# Altium PCB Copy of PCB.PcbDoc
Units mm, origin at the board's own origin, x right, y up, seen from the top; angles counter-clockwise.
Board outline 34.04 x 18.67 mm, 2 copper layers (Top Layer, Bottom Layer); 31 components, 23 nets, 127 pads, 31 vias.
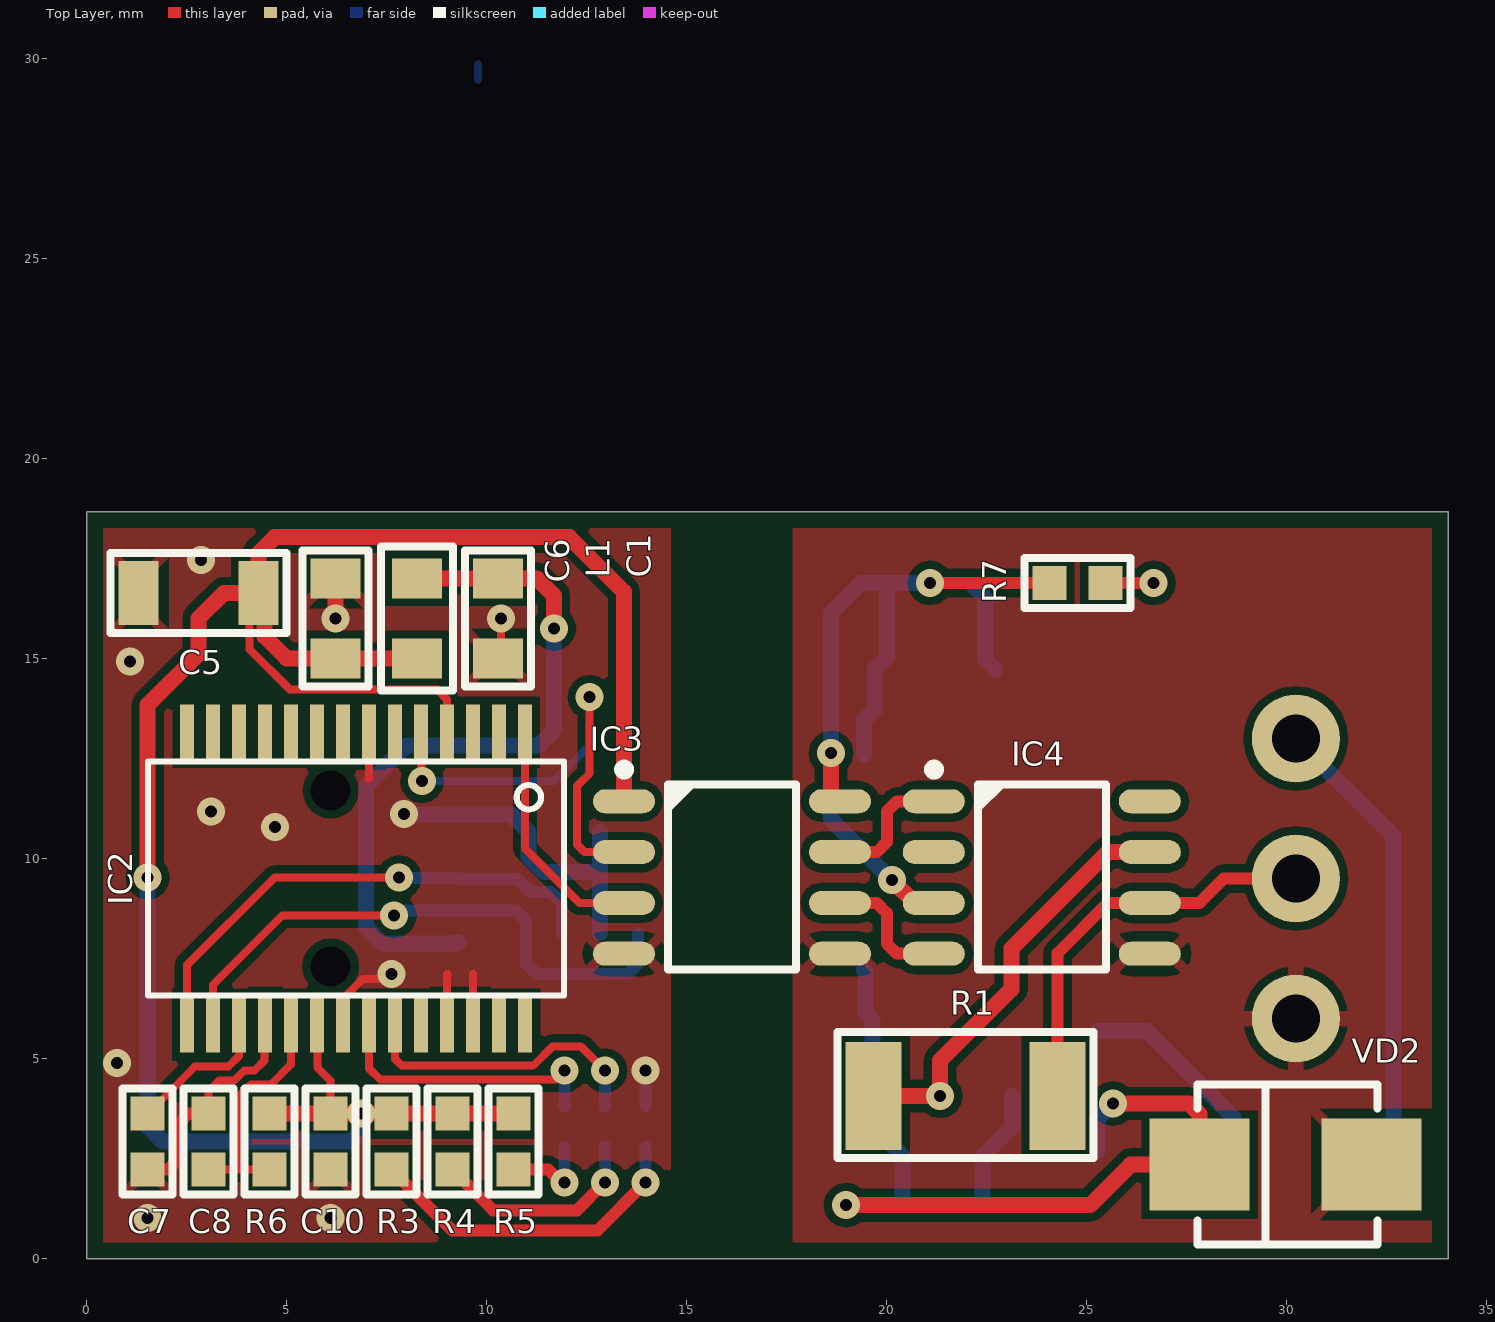
[diagram p0: Top Layer view]
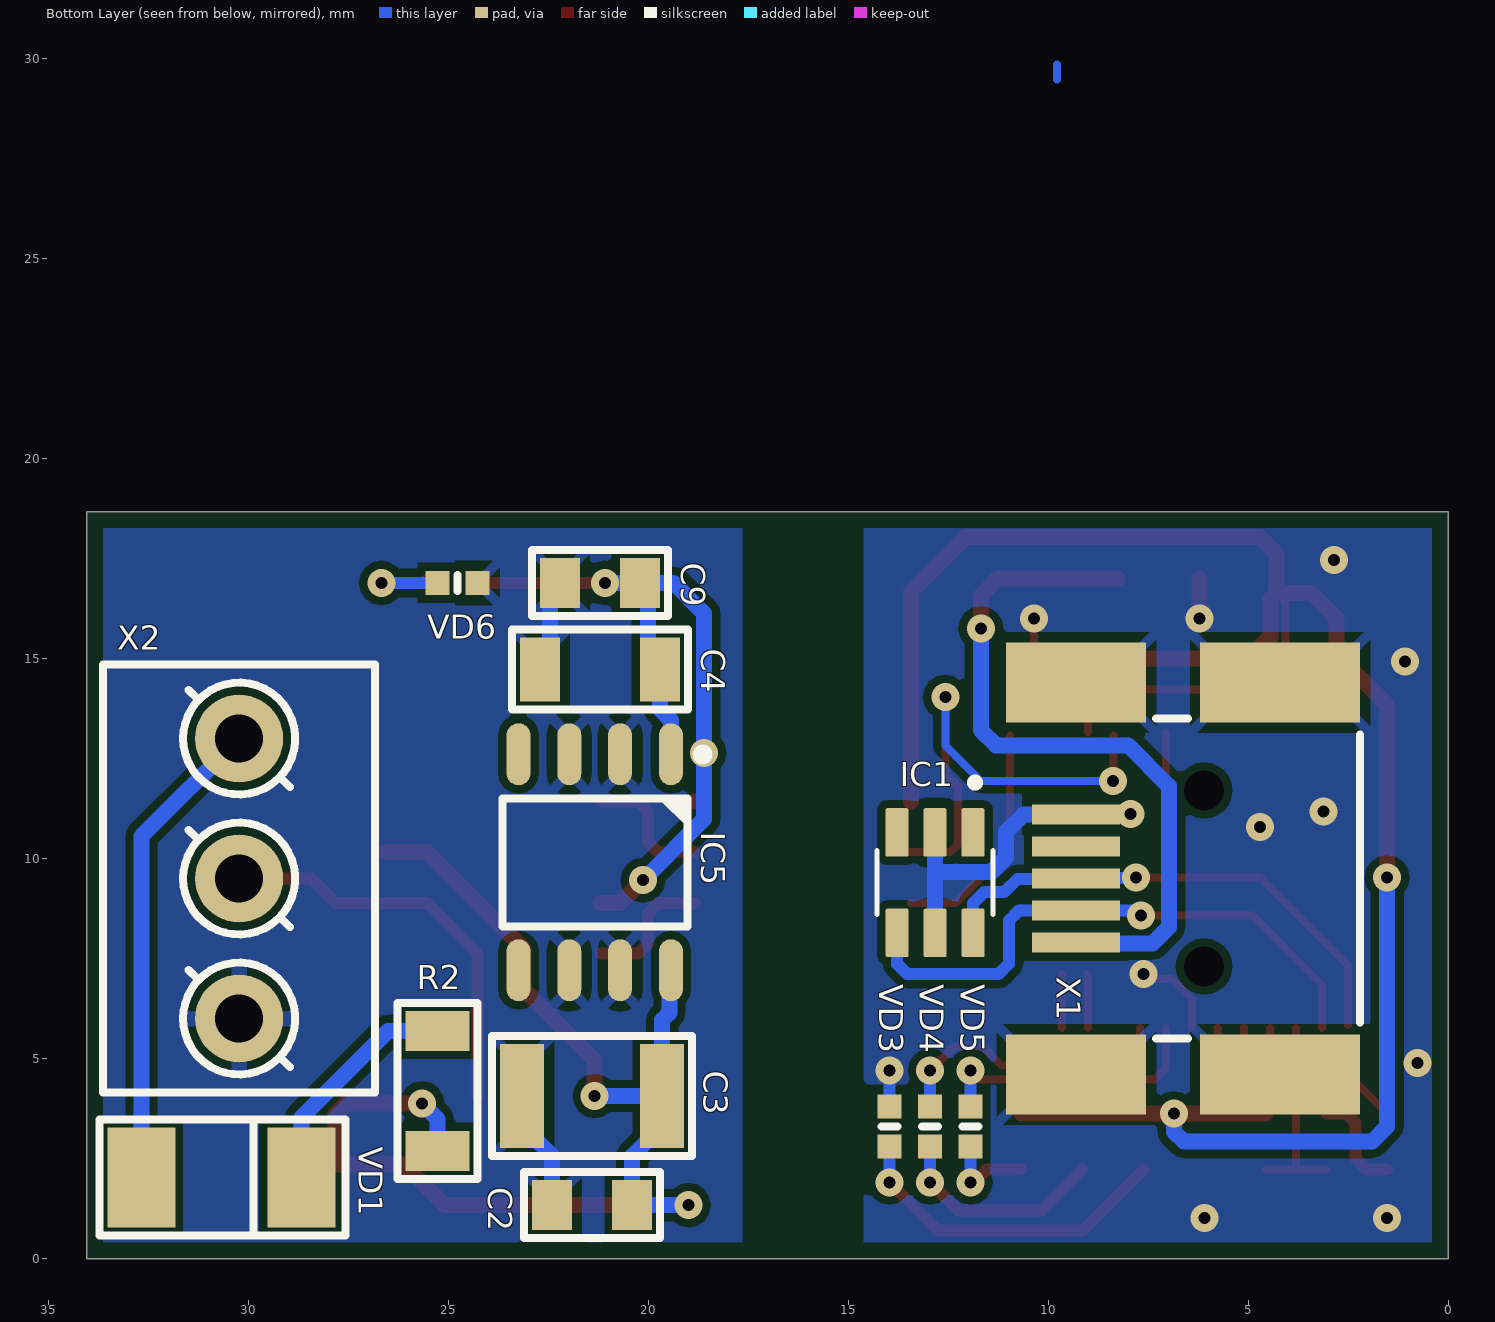
[diagram p1: Bottom Layer view, seen from below]

## Layer stack, top to bottom
Top Solder: solder mask 0.0102, Solder Resist, Dk 3.5
Top Layer: signal copper 0.0356
Dielectric 1: dielectric 0.32, FR-4, Dk 4.8
Bottom Layer: signal copper 0.0356
Bottom Solder: solder mask 0.0102, Solder Resist, Dk 3.5

## Board outline
0,0 34.036,0 34.036,18.669 0,18.669

## Design rules (kind name [scope] priority, off if disabled: settings)
BoardOutlineClearance [All] p1: gap=0.4 ignorepadtopadclearanceinfootprint=FALSE
Clearance Clearance_1 [InPolygon] p1: gap=0.2 ignorepadtopadclearanceinfootprint=FALSE
Clearance [All] p2: gap=0.15 ignorepadtopadclearanceinfootprint=FALSE
HoleSize [All] p1: absolutevalues=TRUE maxlimit=2.54 minlimit=0.3 maxpercent=80.000 minpercent=20.000
HoleToHoleClearance [All] p1: gap=0.2 allowstackedmicrovias=TRUE
MinimumAnnularRing [All] p1: minimumring=0.2
MinimumSolderMaskSliver [All] p1: minsoldermaskwidth=0.15
PolygonConnect PolygonConnect_1 [IsVia] p1: connectstyle=Direct reliefconductorwidth=0.254 reliefentries=4 polygonreliefangle="90 Angle" airgapwidth=0.254
PolygonConnect [All] p2: thpad.connectstyle=Relief thpad.reliefconductorwidth=0.4 thpad.reliefentries=4 thpad.polygonreliefangle="90 Angle" thpad.airgapwidth=0.2 smdpad.connectstyle=Relief smdpad.reliefconductorwidth=0.254 smdpad.reliefentries=4 smdpad.polygonreliefangle="45 Angle" smdpad.airgapwidth=0.254 via.connectstyle=Relief via.reliefconductorwidth=0.254 via.reliefentries=4 via.polygonreliefangle="45 Angle" via.airgapwidth=0.254
RoutingVias [All] p1: holewidth=0.3 width=0.6 viastyle="Through Hole" minholewidth=0.3 minwidth=0.6 maxholewidth=0.3 maxwidth=0.6
SilkToSilkClearance [All] p1: silktosilkclearance=0.1
SilkToSolderMaskClearance [IsPad] p1: minsilkscreentomaskgap=0.15 clearancetoexposedcopper=TRUE
SolderMaskExpansion [All] p1: expansion=0.102
UnRoutedNet [All] p1: checkbadconnections=TRUE
UnpouredPolygon [All] p1: allowunpoured=TRUE
Width [All] p1: maxlimit=2 minlimit=0.125 preferedwidth=0.15 minimp=50.000000 maximp=50.000000 favimp=50.000000
23 further rules are at their usual default settings.

## Components (designator, comment, footprint, x,y, rotation, side; value= is the part's Value field where it differs from the comment)
C1 "Ceramic capacitor, 0.1μF, X7R, ±10%, 16V, 0805, -55...+125°C" "CAP: 0805" 10.287,16.002 r90 top value=0.1?F
C2 "Ceramic capacitor, 0.1μF, X7R, ±10%, 16V, 0805, -55...+125°C" "CAP: 0805" 21.399,1.333 r180 bottom value=0.1?F
C3 "Ceramic capacitor, 10μF, X7R, ±10%, 50V, 1210, -55...+125°C" "CAP: 1210" 21.399,4.064 r180 bottom value=10?F
C4 "Ceramic capacitor, 4.7μF, X7R, ±10%, 50V, 1206, -55...+125°C" "CAP: 1206" 21.209,14.732 r180 bottom value=4.7?F
C5 "Ceramic capacitor, 4.7μF, X7R, ±10%, 50V, 1206, -55...+125°C" "CAP: 1206" 2.794,16.637 r0 top value=4.7?F
C6 "Ceramic capacitor, 0.1μF, X7R, ±10%, 16V, 0805, -55...+125°C" "CAP: 0805" 6.223,16.002 r270 top value=0.1?F
C7 "Ceramic capacitor, 0.1μF, X7R, ±10%, 16V, 0603, -55...+125°C" "CAP: 0603" 1.524,2.921 r90 top value=0.1?F
C8 "Ceramic capacitor, 0.1μF, X7R, ±10%, 16V, 0603, -55...+125°C" "CAP: 0603" 3.048,2.921 r270 top value=0.1?F
C9 "Ceramic capacitor, 0.1μF, X7R, ±10%, 16V, 0805, -55...+125°C" "CAP: 0805" 21.209,16.891 r180 bottom value=0.1?F
C10 "Ceramic capacitor, 0.1μF, X7R, ±10%, 16V, 0805, -55...+125°C" "CAP: 0603" 6.096,2.921 r90 top value=0.1?F
IC1 "SN65220DBVR" SOT95P280X145-6N 12.827,9.398 r270 bottom
IC2 "FT232RL" SSOP28-LD 6.735,9.5 r180 top
IC3 "IC digital isolator, 100Mbps, 3000Vrms, 2.25...5.5V, -55...+125°C, 8-SOIC" 8-SOIC 16.129,9.525 r0 top
IC4 "Si9243" 8-SOIC 23.876,9.525 r0 top
IC5 "LM2936-5.0" 8-SOIC 21.336,9.906 r270 bottom
L1 "Fixed inductor, 47μH, ±20%, 0805, 100mA, -55...+125°C" "IND: 0805" 8.255,16.002 r90 top value=47?H
R1 "Resistor film, 510R, ±5%, 2010, 0.75W, -55...+125°C" "RES: 2010" 21.971,4.064 r180 top value=510R
R2 "Resistor film, 10R, ±5%, 1206, 0.25W, -55...+125°C" "RES: 1206" 25.273,4.191 r90 bottom value=10R
R3 "Resistor film, 270R, ±5%, 0603, 0.1W, -55...+125°C" "RES: 0603" 7.62,2.921 r90 top value=270R
R4 "Resistor film, 270R, ±5%, 0603, 0.1W, -55...+125°C" "RES: 0603" 9.144,2.921 r90 top value=270R
R5 "Resistor film, 270R, ±5%, 0603, 0.1W, -55...+125°C" "RES: 0603" 10.668,2.921 r90 top value=270R
R6 "Resistor film, 10K, ±5%, 0603, 0.1W, -55...+125°C" "RES: 0603" 4.572,2.921 r90 top value=10K
R7 "Resistor film, 270R, ±5%, 0603, 0.1W, -55...+125°C" "RES: 0603" 24.765,16.891 r180 top value=270R
VD1 "Single diode, 75V, 150mA, 1V, 4ns, SOD-323, -55...+150°C" "DIODE: SMA" 30.67,2.032 r180 bottom
VD2 "Zener diode, 18V, 500mW, 0.9V, 17Ohm, SOD-123, -55...+150°C" "DIODE: SMB" 29.972,2.349 r180 top locked
VD3 "LED, *, *, *, -55...+150°C" "LED: 0402B" 13.97,3.302 r90 bottom
VD4 "LED, *, *, *, -55...+150°C" "LED: 0402B" 12.954,3.302 r90 bottom
VD5 "LED, *, *, *, -55...+150°C" "LED: 0402B" 11.938,3.302 r90 bottom
VD6 "LED, *, *, *, -55...+150°C" "LED: 0402B" 24.765,16.891 r180 bottom
X1 "USB mini B" "CON: 0675031020" 9.3,9.5 r0 bottom locked
X2 "Terminal connector, 3pin, 3.5mm, 300VAC, 10A" "CON: DG350-3.5-03P" 30.226,9.5 r270 bottom

## Footprints (in the part's own frame and the unit in brackets; to place one, negate y for a bottom-side part, rotate by r counter-clockwise, add the part's x,y. Pads: shape width x height; smd on the part's side, far side on the other; paste and mask are expansions set on the pad)
8-SOIC [mm] "pitch 1.27 mm"
  rrect100% 1.55x0.6 smd: 1(-2.7,1.905) 2(-2.7,0.635) 3(-2.7,-0.635) 4(-2.7,-1.905) 5(2.7,-1.905) 6(2.7,-0.635) 7(2.7,0.635) 8(2.7,1.905)
  round 0.7 on Mech1: 28(-2.395,1.8)
  silkscreen extent -2.82,-2.3 1.61,2.82, body extent -3,-2.45 3,2.45, height 1.75
"CAP: 0603" [mm]
  rect 0.85x0.85 smd: 1(-0.7,0) 2(0.7,0)
  silkscreen extent -1.33,-0.62 1.33,0.62, body extent -0.8,-0.4 0.8,0.4, height 0.3
"CAP: 0805" [mm]
  rect 1x1.25 smd: 1(-1,0) 2(1,0)
  silkscreen extent -1.7,-0.82 1.7,0.82, body extent -1,-0.62 1,0.63, height 0.78
"CAP: 1206" [mm]
  rect 1x1.6 smd: 1(-1.5,0) 2(1.5,0)
  silkscreen extent -2.2,-1 2.2,1, body extent -1.6,-0.8 1.6,0.8, height 1
"CAP: 1210" [mm]
  rect 1.1x2.6 smd: 1(-1.75,0) 2(1.75,0)
  silkscreen extent -2.5,-1.5 2.5,1.5, body extent -2,-1.24 2,1.24, height 1.7
"CON: 0675031020" [mm]
  rect 4x2 smd: 0(-5.1,-4.9) 0(-5.1,4.9)
  rect 3.5x2 smd: 0(0,-4.9) 0(0,4.9)
  rect 2.2x0.5 smd: 1(0,1.6) 2(0,0.8) 3(0,0) 4(0,-0.8) 5(0,-1.6)
  round 0 hole 1: ""(-3.2,-2.2) ""(-3.2,2.2)
  round 0.5 on Mech1: ""(-0.6,4.5)
  round 0.5 on Bottom Overlay: ""(1,2.5)
  silkscreen extent -7.1,-4 -2,4, body extent -9.1,-4.95 -0.1,4.95, height 3.95
"CON: DG350-3.5-03P" [mm]
  round 2.2 hole 1.2: 1(-3.5,0) 2(0,0) 3(3.5,0)
  round 0.5 on Bottom Overlay: ""(-4.85,-2.9)
  silkscreen extent -5.35,-3.4 5.35,3.4, body extent -5.75,-3.4 5.75,3.4, height 8.4
"DIODE: SMA" [mm]
  rect 1.7x2.5 smd: 1(-2,0) 2(2,0)
  round 0.5 on Mech1: ""(2,0.9)
  silkscreen extent -3.05,-1.45 3.1,1.45, body extent -2.5,-1.35 2.5,1.35, height 2.28
"DIODE: SMB" [mm]
  rect 2.5x2.3 smd: 1(-2.15,0) 2(2.15,0)
  silkscreen extent -2.3,-2 2.2,2, body extent -2.75,-1.95 2.75,1.95, height 2.45
"IND: 0805" [mm]
  rect 1x1.25 smd: 1(-1,0) 2(1,0)
  silkscreen extent -1.8,-0.9 1.8,0.9, body extent -1,-0.62 1,0.63, height 0.85
"LED: 0402B" [mm]
  rect 0.6x0.6 smd: 1(-0.5,0) 2(0.5,0)
  silkscreen extent 0,-0.2 0,0.2, body extent -0.5,-0.25 0.51,0.25, height 0.45
"RES: 0603" [mm]
  rect 0.85x0.85 smd: 1(-0.7,0) 2(0.7,0)
  silkscreen extent -1.33,-0.62 1.33,0.62, body extent -0.8,-0.4 0.8,0.4, height 0.44
"RES: 1206" [mm]
  rect 1x1.6 smd: 1(-1.5,0) 2(1.5,0)
  silkscreen extent -2.2,-1 2.2,1, body extent -1.65,-0.8 1.55,0.8, height 0.47
"RES: 2010" [mm]
  rect 1.4x2.7 smd: 1(-2.3,0) 2(2.3,0)
  silkscreen extent -3.2,-1.6 3.2,1.55, body extent -2.5,-1.25 2.5,1.25, height 0.6
SOT95P280X145-6N [mm]
  rrect15% 1.21x0.58 smd: 1(-1.255,0.95) 2(-1.255,0) 3(-1.255,-0.95) 4(1.255,-0.95) 5(1.255,0) 6(1.255,0.95)
  silkscreen extent -2.6,-1.45 0.8,1.45
SSOP28-LD [mil]
  rect 13.7x55 smd: 1(-166.34,-143.94) 2(-140.75,-143.94) 3(-115.16,-143.94) 4(-89.57,-143.94) 5(-63.98,-143.94) 6(-38.39,-143.94) 7(-12.8,-143.94) 8(12.8,-143.94) 9(38.39,-143.94) 10(63.98,-143.94) 11(89.57,-143.94) 12(115.16,-143.94) 13(140.75,-143.94) 14(166.34,-143.94) 15(166.34,143.94) 16(140.75,143.94) 17(115.16,143.94) 18(89.57,143.94) 19(63.98,143.94) 20(38.39,143.94) 21(12.8,143.94) 22(-12.8,143.94) 23(-38.39,143.94) 24(-63.98,143.94) 25(-89.57,143.94) 26(-115.16,143.94) 27(-140.75,143.94) 28(-166.34,143.94)
  silkscreen extent -205,-115 205,115

## Part data
C1 C2 C6 C9 C10: library part Ceramic_0805, Manufacturer=Yageo, Package=0805, PartNumber=CC0805KRX7R7BB104, Temperature=-55...+125°C, Tolerance=±10%, TypeCapacitor="Ceramic capacitor", TypeDielectric=X7R, ValueManufacturerPartNumber="Ceramic capacitor, 0.1?F, X7R, ±10%, 16V, 0805, -55...+125°C", Voltage=16V, HelpURL=https://www.digikey.com/product-detail/en/yageo/CC0805KRX7R7BB104/311-1142-1-ND/303052
C3: library part Ceramic_1210, Manufacturer=Yageo, Package=1210, PartNumber=CC1210KKX7R9BB104, Temperature=-55...+125°C, Tolerance=±10%, TypeCapacitor="Ceramic capacitor", TypeDielectric=X7R, ValueManufacturerPartNumber="Ceramic capacitor, 10?F, X7R, ±10%, 50V, 1210, -55...+125°C", Voltage=50V, HelpURL=https://www.digikey.com/product-detail/en/yageo/CC1210KKX7R9BB104/311-4522-1-ND/8025611
C4 C5: library part Ceramic_1206, Manufacturer=Yageo, Package=1206, PartNumber=CC1206KRX7R9BB104, Temperature=-55...+125°C, Tolerance=±10%, TypeCapacitor="Ceramic capacitor", TypeDielectric=X7R, ValueManufacturerPartNumber="Ceramic capacitor, 4.7?F, X7R, ±10%, 50V, 1206, -55...+125°C", Voltage=50V, HelpURL=https://www.digikey.com/product-detail/en/yageo/CC1206KRX7R9BB104/311-1179-1-ND/303089
C7 C8: library part Ceramic_0603, Manufacturer=Yageo, Package=0603, PartNumber=CC0603KRX7R7BB104, Temperature=-55...+125°C, Tolerance=±10%, TypeCapacitor="Ceramic capacitor", TypeDielectric=X7R, ValueManufacturerPartNumber="Ceramic capacitor, 0.1?F, X7R, ±10%, 16V, 0603, -55...+125°C", Voltage=16V, HelpURL=https://www.digikey.com/product-detail/en/yageo/CC0603KRX7R7BB104/311-1088-1-ND/302998
IC1: "IC SINGLE USB PORT TVS SOT-23-6", Package="SOT-23-6 Texas Instruments", Availability=Unavailable, MF="Texas Instruments", MP=SN65220DBVR, Price=None, SnapEDA_Link=https://www.snapeda.com/parts/SN65220DBVR/Texas%20Instruments/view-part/214591/?ref=snap
IC2: "USB e??e", Package="SSOP-28 FTDI, Future", Availability=Unavailable, MF="FTDI, Future", MP=FT232RL, Price=None, SnapEDA_Link=https://www.snapeda.com/parts/FT232RL/FTDI%2C%20Future%20Technology%20Devices%20International%20Ltd/view-part/1077088/?ref=snap
IC3: library part ISO7721DR, "Digital isolator", Manufacturer="Texas Instruments", Package=8-SOIC, Temperature=-55...+125°C, ComponentType="IC digital isolator", DataRate=100Mbps, HelpURL=https://www.digikey.com/product-detail/en/texas-instruments/ISO7721DR/296-48296-1-ND/8347715, Isolation=3000Vrms, PartNumber=ISO7721DR, Supply=2.25...5.5V, ValueManufacturerPartNumber="IC digital isolator, 100Mbps, 3000Vrms, 2.25...5.5V, -55...+125°C, 8-SOIC"
L1: library part Inductor_0805, Manufacturer="Murata Electronics", MaxCurrent=100mA, Package=0805, PartNumber=LQM21FN100M70L, Temperature=-55...+125°C, Tolerance=±20%, TypeInductor="Fixed inductor", ValueManufacturerPartNumber="Fixed inductor, 47?H, ±20%, 0805, 100mA, -55...+125°C", HelpURL=https://www.digikey.com/product-detail/en/murata-electronics-north-america/LQM21FN100M70L/490-4029-1-ND/1016289
R1: library part Resistor_2010, Manufacturer=Yageo, Package=2010, PartNumber=RC2010JK-07100RL, Power=0.75W, Temperature=-55...+125°C, Tolerance=±5%, TypeResistor="Resistor film", HelpURL=https://www.digikey.com/product-detail/en/yageo/RC2010JK-07100RL/YAG3381CT-ND/5962203, ValueManufacturerPartNumber="Resistor film, 510R, ±5%, 2010, 0.75W, -55...+125°C"
R2: library part Resistor_1206, Manufacturer=Yageo, Package=1206, PartNumber=RC1206JR-07100RL, Power=0.25W, Temperature=-55...+125°C, Tolerance=±5%, TypeResistor="Resistor film", HelpURL=https://www.digikey.com/product-detail/en/yageo/RC1206JR-07100RL/311-100ERCT-ND/732153, ValueManufacturerPartNumber="Resistor film, 10R, ±5%, 1206, 0.25W, -55...+125°C"
R3 R4 R5 R6 R7: library part Resistor_0603, Manufacturer=Yageo, Package=0603, PartNumber=RC0603JR-07100RL, Power=0.1W, Temperature=-55...+125°C, Tolerance=±5%, TypeResistor="Resistor film", HelpURL=https://www.digikey.com/product-detail/en/yageo/RC0603JR-07100RL/311-100GRCT-ND/729644
  R3 R4 R5 R7: ValueManufacturerPartNumber="Resistor film, 270R, ±5%, 0603, 0.1W, -55...+125°C"
  R6: ValueManufacturerPartNumber="Resistor film, 10K, ±5%, 0603, 0.1W, -55...+125°C"
VD1: library part Diode_single, Current=150mA, Manufacturer="Micro Commercial", Package=SOD-323, PartNumber=GS1M, Temperature=-55...+150°C, Voltage=75V, VoltageDrop=1V, HelpURL=https://www.digikey.com/product-detail/en/micro-commercial-co/1N4148WX-TP/1N4148WXTPMSCT-ND/717312, RecoveryTime=4ns, TypeDiode="Single diode", ValueManufacturerPartNumber="Single diode, 75V, 150mA, 1V, 4ns, SOD-323, -55...+150°C"
VD2: library part TVS_single, Current=500mW, Manufacturer="Diodes Incorporated", Package=SOD-123, PartNumber=SMBJ18A, Temperature=-55...+150°C, Voltage=18V, VoltageDrop=0.9V, HelpURL=https://www.digikey.com/product-detail/en/diodes-incorporated/MMSZ5231B-7-F/MMSZ5231B-FDICT-ND/755506, RecoveryTime=17Ohm, TypeDiode="Zener diode", ValueManufacturerPartNumber="Zener diode, 18V, 500mW, 0.9V, 17Ohm, SOD-123, -55...+150°C"
VD3 VD6: library part LED_single, Color=RED, Temperature=-55...+150°C, TypeDiode=LED, ValueManufacturerPartNumber="LED, *, *, *, -55...+150°C"
VD4: library part LED_single, Color=GREEN, Temperature=-55...+150°C, TypeDiode=LED, ValueManufacturerPartNumber="LED, *, *, *, -55...+150°C"
VD5: library part LED_single, Color=BLUE, Temperature=-55...+150°C, TypeDiode=LED, ValueManufacturerPartNumber="LED, *, *, *, -55...+150°C"
X1: library part Connector_USB_mini_B, Manufacturer=Molex, PartNumber=0675031020, CommentText="\"USB\"", HelpURL=https://www.digikey.com/product-detail/en/molex/0675031020/WM5461CT-ND/1624427, TypeConnector="USB mini B", ValueManufacturerPartNumber="USB mini B"
X2: library part Connector_terminal_3pin, CurrentMax=10A, Manufacturer=Degson, PartNumber=DG350-3.5-03P-14, VoltageMax=300VAC, CommentText="\"Ðàçúåì\"", HelpURL=https://www.chipdip.ru/product/dg350-3.5-03p-12, Multichannel=3pin, Pitch=3.5mm, TypeConnector="Terminal connector", ValueManufacturerPartNumber="Terminal connector, 3pin, 3.5mm, 300VAC, 10A"

## Via types
v1: diameter 0.7, hole 0.3, Top Layer to Bottom Layer, tented both sides, 31 vias

## Nets (pads, with @x,y where several pads share a name; then routed paths per layer and width w, separated by ;. In a path a pad name is that pad's centre, name@x,y a point inside that pad or via, vN(x,y) a via of type N, cw(c..) or ccw(c..) an arc to the next point about the centre after c; other vN are vias at no path point)
3V3: C7.2 IC2.17 | length 3.6
  Top Layer w0.2: C7.2 2.698,4.795 3.538,4.795 3.81,5.067 IC2.17@3.81,5.769
+5: C4.2 C9.2 IC3.8 IC4.3 IC5.1 R7.2 | length 20.3
  Top Layer w0.3: v1(21.082,16.891) R7.2
  Top Layer w0.4: v1(18.605,12.636) 18.605,11.561 18.736,11.43 IC3.8 ; v1(20.13,9.461) 20.701,8.89 IC4.3
  Bottom Layer w0.4: IC5.1 19.431,13.462 19.709,13.74 C4.2 20.002,15.026 20.002,16.684 C9.2 ; v1(20.13,9.461) 18.605,10.986 v1(18.605,12.636) 18.605,16.129 19.367,16.891 C9.2 ; v1(21.082,16.891) C9.2
+5_USB: C5.2 C6.2 C10.2 IC2.4 IC2.20 IC3.1 L1.1 R3.2 R4.2 R5.2 R6.2 | length 58.5
  Top Layer w0.2: C5.2 4.064,16.407 4.064,15.24 5.08,14.224 8.763,14.224 9.01,13.977 IC2.4 ; IC2.20@5.76,5.769 5.77,5.759 5.77,4.771 6.096,4.445 C10.2
  Top Layer w0.4: v1(1.524,9.525) 1.524,13.843 2.794,15.113 2.794,16.002 3.429,16.637 C5.2 ; R6.2 C10.2 v1(6.858,3.621) R3.2 R4.2 R5.2 ; L1.1 C6.2 4.994,15.002 4.445,15.551 4.445,16.486 C5.2 ; IC3.1 13.429,16.67 12.065,18.034 4.699,18.034 4.294,17.629 C5.2
  Bottom Layer w0.4: v1(1.524,9.525) 1.524,3.302 1.905,2.921 6.604,2.921 6.858,3.175 v1(6.858,3.621)
+12: C2.2 C3.2 IC4.7 IC5.8 R1.2 R2.1 VD2.2 | length 34.1
  Top Layer w0.4: v1(18.986,1.333) 25.082,1.333 26.098,2.349 VD2.2 27.822,3.611 27.559,3.873 v1(25.654,3.873) ; R1.2 v1(21.336,4.064) 21.336,4.953 23.114,6.731 23.114,7.747 25.527,10.16 IC4.7
  Bottom Layer w0.4: v1(18.986,1.333) C2.2 20.4,2.564 19.649,3.314 C3.2 ; IC5.8 19.469,7.168 19.469,6.144 19.649,5.964 C3.2 ; v1(21.336,4.064) C3.2 ; R2.1 25.273,3.492 v1(25.654,3.873)
D+: IC1.6 IC2.15 X1.3 | length 12.8
  Top Layer w0.2: IC2.15 2.51,7.336 4.699,9.525 v1(7.81,9.525)
  Bottom Layer w0.3: v1(7.81,9.525) 7.823,9.512 9.287,9.512 X1.3 9.315,9.485 10.772,9.485 11.094,9.162 11.602,9.162 11.877,8.888 IC1.6
D-: IC1.4 IC2.16 X1.2 | length 14.6
  Top Layer w0.2: IC2.16@3.16,5.769 IC2.16 3.16,6.843 4.889,8.572 v1(7.683,8.572)
  Bottom Layer w0.3: v1(7.683,8.572) 7.811,8.7 X1.2 10.731,8.7 10.986,8.445 10.986,7.366 11.239,7.112 13.525,7.112 13.777,7.364 IC1.4
GND: C2.1 C3.1 C4.1 C9.1 IC3.5 IC4.5 IC5.2 IC5.3 IC5.6 IC5.7 VD2.1 VD6.2 X2.3 | length 5.3
  Bottom Layer w0.4: C9.1@22.209,16.764 22.459,16.514 22.459,14.982 C4.1 ; C2.1 22.399,2.564 23.15,3.314 C3.1
GND_USB: C1.1 C5.1 C6.1 C7.1 C8.1 C10.1 IC1.2 IC1.5 IC2.7 IC2.18 IC2.21 IC2.25 IC2.26 IC3.4 VD3.2 X1.0 X1.5 | length 22.9
  Top Layer w0.2: C8.1 3.048,4.191 3.302,4.445 3.683,4.445 3.945,4.707 4.199,4.707 4.445,4.953 4.445,5.754 IC2.18@4.46,5.769 ; IC2.21@6.41,5.769 IC2.21 6.41,6.492 6.903,6.985 v1@7.493,6.985 ; 7.048,12.002 7.06,12.013 IC2.7 ; IC2.25@9.01,5.769 IC2.25 9.01,7.105 9.017,7.112 ; 9.652,7.112 9.66,7.104 IC2.26 IC2.26@9.66,5.769 ; C1.1 10.351,15.066 v1(10.351,16.002)
  Top Layer w0.3: C7.1 2.03,2.221 2.323,2.514 2.323,3.403 2.542,3.621 C8.1
  Top Layer w0.4: v1(6.223,16.002) C6.1
  Bottom Layer w0.3: VD3.2 v1(13.97,4.699)
  Bottom Layer w0.4: v1(7.938,11.112) 7.944,11.106 9.294,11.106 X1.5 10.617,11.1 11.049,10.668 11.049,10.033 11.42,9.662 12.827,9.662 ; IC1.5 12.827,9.662 ; IC1.2 12.827,9.662
  other v1: 1.524,1.016 6.096,1.016 0.762,4.889 7.62,7.112 4.71,10.784 3.111,11.176 1.079,14.922 2.857,17.462
K-Line: IC4.6 R1.1 X2.2 | length 10.3
  Top Layer w0.3: R1.1 24.271,7.634 25.527,8.89 IC4.6 27.813,8.89 28.423,9.5 X2.2
NetC1_2: C1.2 L1.2 X1.1 | length 18.3
  Top Layer w0.4: L1.2 C1.2 11.256,17.002 11.684,16.573 v1(11.684,15.748)
  Bottom Layer w0.4: X1.1 9.272,7.872 7.394,7.872 6.983,8.283 6.983,11.809 8.001,12.827 11.303,12.827 11.684,13.208 v1(11.684,15.748)
NetR2_2: R2.2 VD1.2 | length 5.8
  Bottom Layer w0.4: R2.2 26.503,5.691 28.671,3.524 VD1.2
NetR3_1: R3.1 VD3.1 | length 8.4
  Top Layer w0.3: R3.1 9.142,0.699 12.763,0.699 v1(13.97,1.905)
  Bottom Layer w0.3: v1(13.97,1.905) VD3.1
NetR4_1: R4.1 VD4.1 | length 5.4
  Top Layer w0.3: R4.1 10.158,1.206 12.255,1.206 v1(12.954,1.905)
  Bottom Layer w0.3: v1(12.954,1.905) VD4.1
NetR5_1: R5.1 VD5.1 | length 2.3
  Top Layer w0.3: R5.1 11.543,2.221 11.859,1.905 v1(11.938,1.905)
  Bottom Layer w0.3: v1(11.938,1.905) VD5.1
NetR7_1: R7.1 VD6.1 | length 2.8
  Top Layer w0.3: R7.1 R7.1@25.592,16.891 ; R7.1@25.465,17.018 R7.1@25.592,16.891 ; v1(26.67,16.891) R7.1@25.592,16.891
  Bottom Layer w0.3: VD6.1 v1(26.67,16.891)
NetVD1_1: VD1.1 X2.1 | length 12
  Bottom Layer w0.4: X2.1 32.67,10.556 VD1.1
RST: C8.2 IC2.19 R6.1 | length 5.9
  Top Layer w0.2: C8.2 3.81,2.221 ; R6.1 3.81,2.221 ; IC2.19@5.11,5.769 5.11,4.856 4.611,4.357 4.104,4.357 3.81,4.063 3.81,2.221
RX: IC3.7 IC4.1 | length 3.3
  Top Layer w0.3: IC3.7 19.748,10.16 20.002,10.414 20.002,11.176 20.257,11.43 IC4.1
RXD: IC2.5 IC3.2 | length 12
  Top Layer w0.2: IC2.5@8.36,13.081 8.371,13.07 8.371,11.949 v1(8.382,11.938) ; v1(12.573,14.034) 12.573,12.128 12.255,11.811 12.255,10.351 12.446,10.16 IC3.2
  Bottom Layer w0.2: v1(8.382,11.938) 11.684,11.938 12.573,12.827 v1(12.573,14.034)
RXLED: IC2.22 VD5.2 | length 7
  Top Layer w0.2: IC2.22@7.06,5.769 7.06,5.193 7.06,4.751 7.34,4.471 11.71,4.471 v1(11.938,4.699)
  Bottom Layer w0.3: VD5.2 v1(11.938,4.699)
TX: IC3.6 IC4.4 | length 3.3
  Top Layer w0.3: IC3.6 19.748,8.89 20.002,8.636 20.002,7.874 20.256,7.62 IC4.4
TXD: IC2.1 IC3.3 | length 5.9
  Top Layer w0.2: IC2.1@10.96,13.081 10.96,10.249 12.319,8.89 IC3.3
TXLED: IC2.23 VD4.2 | length 7.4
  Top Layer w0.2: IC2.23@7.71,5.769 7.71,4.99 7.879,4.821 11.163,4.821 11.641,5.299 12.354,5.299 v1(12.954,4.699)
  Bottom Layer w0.3: VD4.2 v1(12.954,4.699)
pads on no net: IC1.1 IC1.3 IC2.2 IC2.3 IC2.6 IC2.8 IC2.9 IC2.10 IC2.11 IC2.12 IC2.13 IC2.14 IC2.24 IC2.27 IC2.28 IC3.28 IC4.2 IC4.8 IC4.28 IC5.4 IC5.5 IC5.28 VD1. X1. X1.4 X2.
copper on no net: | length 0.4
  Bottom Layer w0.2: 9.779,29.472 9.779,29.845

## Polygon pours and split planes (outlines as drawn)
GND on Top Layer "Top Layer-No Net" (solid, remove dead copper, pour order 2): 17.653,18.669 34.036,18.669 34.036,0 17.653,0
GND_USB on Top Layer "Top Layer-No Net 1" (solid, remove dead copper, pour order 0): 0,18.669 14.605,18.669 14.605,0 0,0
GND on Bottom Layer "Top Layer-No Net" (solid, remove dead copper, pour order 6): 17.653,18.669 34.036,18.669 34.036,0 17.653,0
GND_USB on Bottom Layer "Top Layer-No Net 1" (solid, remove dead copper, pour order 4): 0,18.669 14.605,18.669 14.605,0 0,0